# Altium PCB cw312_xc7a35t.PcbDoc (part 2 of 2)
Units mm, origin at the board's own origin, x right, y up, seen from the top; angles counter-clockwise.
Board outline 58.68 x 53.69 mm, 4 copper layers (Top Layer, Layer 1, Layer 2, Bottom Layer), stack 0.603 mm thick; 60 components, 62 nets, 545 pads, 207 vias.
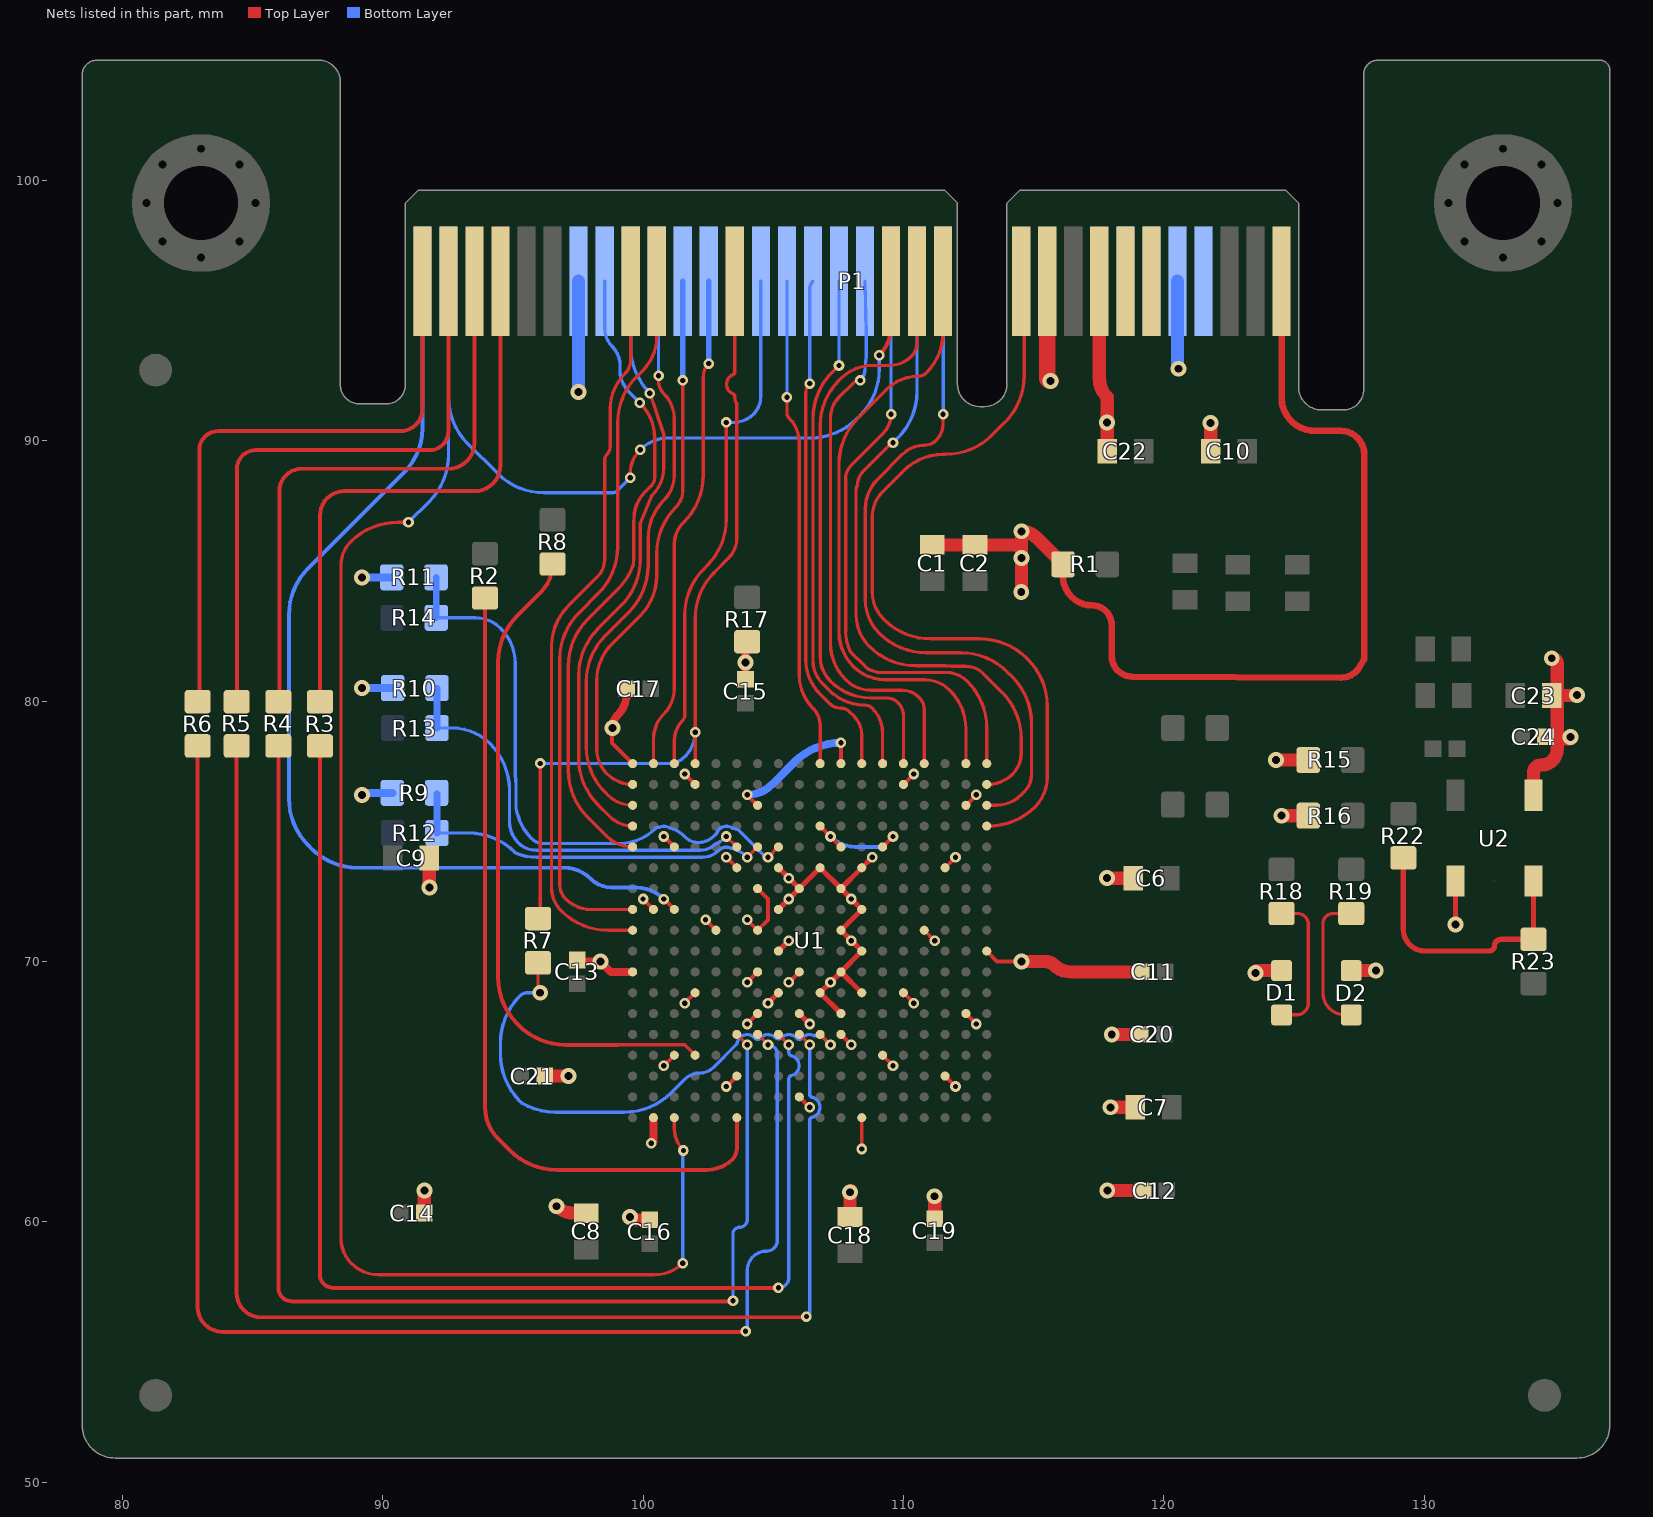
[diagram p4: the nets of this part, all layers, seen from the top]

## Via types
v1: diameter 0.406, hole 0.203, Top Layer to Bottom Layer, tented both sides, 121 vias
v2: diameter 0.61, hole 0.305, Top Layer to Bottom Layer, tented both sides, 86 vias

## Nets (pads, with @x,y where several pads share a name; then routed paths per layer and width w, separated by ;. In a path a pad name is that pad's centre, name@x,y a point inside that pad or via, vN(x,y) a via of type N, cw(c..) or ccw(c..) an arc to the next point about the centre after c; other vN are vias at no path point) (continued)
HDR4: P1.A12 U1.T1 | length 27
  Top Layer w0.127: v1(111.522,91.021) 111.522,90.654 cw(c110.619,90.654) 111.257,90.016 cw(c110.804,90.469) 110.804,89.828 ccw(c110.804,88.638) 109.963,89.479 109.012,88.528 ccw(c110.167,87.374) 108.534,87.374 108.534,83.903 ccw(c110.371,83.903) 109.072,82.604 ccw(c110.868,84.4) 110.868,81.86 112.2,81.86 cw(c112.2,79.32) 113.996,81.116 114.179,80.933 cw(c112.383,79.137) 114.923,79.137 114.923,77.2 cw(c113.951,77.2) 114.638,76.513 114.525,76.4 cw(c113.559,77.366) 113.559,76 U1.T1@113.2,76
  Bottom Layer w0.127: v1(111.522,91.021) 111.525,91.024 P1.A12@111.525,96.127
HDR5: P1.A13 U1.U1 | length 25.2
  Top Layer w0.127: v1(109.6,89.925) ccw(c109.6,89.828) 109.531,89.897 108.463,88.829 ccw(c109.027,88.265) 108.229,88.265 ccw(c108.344,88.15) 108.182,88.15 108.182,83.327 ccw(c109.916,83.327) 108.69,82.1 ccw(c110.486,83.896) 110.486,81.356 111.634,81.356 cw(c111.634,79.94) 111.852,81.339 ccw(c111.87,81.465) 111.87,81.338 112.395,81.338 cw(c112.395,80.378) 113.074,81.057 113.781,80.35 cw(c111.985,78.554) 114.525,78.554 114.525,77.988 cw(c113.41,77.988) 114.198,77.2 cw(c113.233,78.166) 113.233,76.8 U1.U1@113.2,76.8
  Bottom Layer w0.127: v1(109.6,89.925) 109.781,90.106 ccw(c107.985,91.903) 110.525,91.903 P1.A13@110.525,96.127
HDR6: P1.A14 U1.V1 | length 23.1
  Top Layer w0.127: v1(109.525,91.021) cw(c108.477,91.021) 109.218,90.28 108,89.062 ccw(c108.534,88.528) 107.779,88.528 107.779,82.663 ccw(c109.41,82.663) 107.976,81.887 ccw(c108.087,81.949) 107.996,81.86 108.525,81.331 ccw(c109.077,81.883) 108.647,81.231 ccw(c108.716,81.338) 108.659,81.225 ccw(c109.303,82.557) 109.012,81.106 ccw(c109.036,81.23) 109.026,81.104 ccw(c109.077,81.883) 109.077,81.102 111.634,81.102 cw(c111.634,79.94) 112.456,80.762 cw(c110.66,78.966) 113.2,78.966 U1.V1@113.2,77.6
  Bottom Layer w0.127: v1(109.525,91.021) P1.A14@109.525,96.127
HDR7: P1.A15 U1.V4 | length 21.6
  Top Layer w0.127: 108.053,92.197 107.525,91.669 ccw(c108.31,90.884) 107.2,90.884 107.2,82.221 ccw(c109.177,82.221) 107.779,80.823 ccw(c108.76,81.804) 108.76,80.416 109.962,80.416 cw(c109.962,79.537) 110.584,80.159 110.619,80.123 cw(c110.183,79.687) 110.8,79.687 U1.V4@110.8,77.6 ; 108.054,92.197 cw(c108.344,91.906) v1(108.344,92.317)
  Bottom Layer w0.127: v1(108.344,92.317) ccw(c107.908,92.754) 108.525,92.754 cw(c108.652,92.754) 108.526,92.767 108.574,93.249 ccw(c108.182,93.288) 108.576,93.289 108.576,94.091 P1.A15@108.525,96.127
HDR8: P1.A16 U1.V6 | length 20.3
  Top Layer w0.127: v1(107.525,92.892) 107.269,92.636 ccw(c109.065,90.84) 106.525,90.84 106.525,81.561 ccw(c107.791,81.561) 106.896,80.666 107.147,80.414 ccw(c108.51,81.777) 108.51,79.85 cw(c108.51,79.44) 108.8,79.73 cw(c107.834,78.764) 109.2,78.764 U1.V6@109.2,77.6
  Bottom Layer w0.127: v1(107.525,92.892) P1.A16@107.525,96.127
HDR9: P1.A17 U1.V7 | length 19.6
  Top Layer w0.127: v1(106.4,92.197) ccw(c106.766,91.831) 106.248,91.831 106.248,81.604 ccw(c108.145,81.604) 106.804,80.262 107.15,79.916 ccw(c107.6,80.367) 107.6,79.73 cw(c107.6,79.266) 107.928,79.594 108.087,79.435 cw(c107.331,78.679) 108.4,78.679 U1.V7@108.4,77.6
  Bottom Layer w0.127: v1(106.4,92.197) 106.4,95.826 cw(c106.827,95.826) P1.A17@106.525,96.127
HDR10: P1.A18 U1.V9 | length 18.9
  Top Layer w0.127: v1(105.525,91.669) 105.525,91.069 ccw(c105.781,91.069) 105.6,90.888 cw(c104.648,89.936) 105.994,89.936 105.994,81.604 ccw(c108.145,81.604) 106,81.449 cw(c105.873,81.441) 106,81.442 106,80.997 ccw(c107.793,80.997) 106.525,79.73 cw(c105.861,79.066) 106.8,79.066 U1.V9@106.8,77.6
  Bottom Layer w0.127: v1(105.525,91.669) P1.A18@105.525,96.127
IOVREF: C6.1 C7.1 C8.1 C9.1 C10.1 C11.1 C12.1 C13.1 C14.1 C15.1 C16.1 C17.1 C23.1 C24.1 D1.A D2.A P1.A5 P1.A26 P1.B10 R9.2 R10.2 R11.2 R15.1 R16.1 R17.1 U1.A7 U1.A17 U1.B10 U1.C3 U1.C13 U1.D6 U1.D16 U1.F2 U1.G5 U1.G15 U1.H18 U1.J1 U1.K4 U1.K14 U1.L17 U1.N3 U1.N13 U1.P6 U1.P8 U1.P16 U1.R9 U1.T2 U1.T12 U1.U5 U1.U15 U1.V8 U1.V18 U2.1 U2.4 | length 72
  Top Layer w0.152: v2(98.825,78.966) ccw(c98.825,78.94) 98.8,78.94 98.8,78.4 U1.V18@99.6,77.6 ; v1(100,72.399) U1.L17@100.4,72 ; v1(100.8,66) U1.D16@101.2,66.4 ; v1(100.8,74.8) U1.P16@101.2,74.4 ; v1(101.6,68.391) 101.6,68.4 U1.G15@102,68.8 ; v1(101.6,77.2) U1.U15@102,76.8 ; v1(102.4,71.6) U1.K14@102.8,71.2 ; v1(103.2,65.2) U1.C13@103.6,65.6 ; v1(103.2,74) U1.N13@103.6,73.6 ; v1(104,76.4) U1.T12@104.4,76 ; U1.B10@106,64.8 v1(106.4,64.4) ; U1.R9@106.8,75.2 v1(107.2,74.8) U1.P8@107.6,74.4 ; U1.V8@107.6,77.6 v1(107.6,78.4) ; v1(108.4,62.8) U1.A7@108.4,64 ; U1.D6@109.2,66.4 v1(109.6,66) ; U1.P6@109.2,74.4 v1(109.6,74.8) ; U1.G5@110,68.8 110.4,68.4 v1(110.4,68.391) ; U1.U5@110,76.8 v1(110.4,77.2) ; U1.K4@110.8,71.2 v1(111.2,70.8) ; U1.C3@111.6,65.6 v1(112,65.2) ; U1.N3@111.6,73.6 v1(112,74) ; U1.F2@112.4,68 v1(112.8,67.6) ; U1.T2@112.4,76 v1(112.8,76.4) ; U1.J1@113.2,70.4 113.6,70 v2(114.532,70)
  Top Layer w0.203: v2(131.2,71.423) U2.1@131.2,73.089
  Top Layer w0.305: C13.1@97.478,70.06 ccw(c97.623,70.205) 97.623,70 v2(98.361,70) 98.761,69.6 U1.H18@99.6,69.6 ; v2(98.825,78.966) 98.825,78.983 cw(c99.51,78.983) 99.026,79.467 ccw(c98.184,80.308) 99.374,80.308 C17.1@99.374,80.47 ; v1(100.315,63.022) 100.4,63.107 U1.A17@100.4,64 ; C15.1@103.937,80.838 v2(103.937,81.489) 103.937,82.221 cw(c104,82.221) R17.1@104,82.284
  Top Layer w0.508: C14.1@91.6,60.339 v2(91.6,61.2) ; v2(91.792,72.838) C9.1@91.792,73.971 ; v2(96.681,60.6) ccw(c97.311,61.23) 97.311,60.339 C8.1@97.815,60.339 ; v2(99.503,60.187) ccw(c99.77,60.453) 99.77,60.077 C16.1@100.254,60.077 ; v2(114.532,70) 115.464,70 cw(c115.464,69.562) 115.773,69.872 ccw(c116.429,70.528) 116.429,69.6 C11.1@119.14,69.6 ; v2(117.825,73.2) C6.1@118.825,73.2 ; v2(117.83,61.2) C12.1@119.2,61.2 ; v2(117.948,64.4) C7.1@118.9,64.4 ; C10.1@121.8,89.6 v2(121.8,90.688) ; v2(123.52,69.562) cw(c123.608,69.562) 123.608,69.65 D1.A@124.525,69.65 ; v2(124.316,77.74) R15.1@125.55,77.74 ; v2(124.525,75.6) R16.1@125.55,75.6 ; D2.A@127.2,69.65 v2(128.143,69.65) ; U2.4@134.2,76.389 134.2,77.246 cw(c134.501,77.246) 134.501,77.547 ccw(c134.501,78.159) 135.113,78.159 135.113,78.554 ; C23.1@134.9,80.214 C23.1@135.113,80.214 ; v2(134.9,81.646) cw(c134.9,81.433) 135.113,81.433 C23.1@135.113,80.214 ; v2(135.617,78.618) cw(c135.553,78.618) 135.553,78.554 135.113,78.554 ; v2(135.865,80.239) cw(c135.84,80.239) 135.84,80.214 C23.1@135.113,80.214 ; 135.113,78.554 C23.1@135.113,80.214
  Top Layer w0.635: P1.B10@115.525,96.127 115.525,92.423 ccw(c115.649,92.423) v2(115.649,92.298)
  Bottom Layer w0.152: v1(107.2,74.8) ccw(c108.166,75.766) 108.166,74.4 108.717,74.4 ccw(c108.716,74.552) 108.738,74.402 cw(c108.8,74) 108.858,74.402 ccw(c108.878,74.553) 108.876,74.401 109.028,74.4 ccw(c109.028,74.815) 109.321,74.521 v1(109.6,74.8)
  Bottom Layer w0.305: v2(89.2,76.4) cw(c89.393,76.207) 89.393,76.48 R9.2@90.369,76.48 ; v2(89.2,80.502) R10.2@90.384,80.502 ; v2(89.2,84.755) R11.2@90.351,84.755 ; v1(104,76.4) ccw(c104,77.74) 104.948,76.792 105.816,77.661 cw(c107.6,75.877) v1(107.6,78.4)
  Bottom Layer w0.508: v2(97.525,91.872) P1.A26@97.525,96.127 ; P1.A5@120.525,96.127 120.525,92.867 ccw(c120.666,92.867) v2(120.566,92.767)
JTAG_TCK: P1.B32 R6.1 | length 24.1
  Top Layer w0.152: R6.1@82.895,79.98 ccw(c82.895,80.041) 82.956,80.041 82.956,89.637 cw(c83.693,89.637) 83.693,90.373 90.68,90.373 ccw(c90.68,91.218) 91.525,91.218 P1.B32@91.525,96.127
JTAG_TDI: P1.B29 R3.1 | length 22.3
  Top Layer w0.152: R3.1@87.594,79.98 87.594,87.134 cw(c88.522,87.134) 88.522,88.062 93.525,88.062 ccw(c93.525,89.062) 94.525,89.062 P1.B29@94.525,96.127
JTAG_TDO: P1.B30 R4.1 | length 22.9
  Top Layer w0.152: R4.1@85.994,79.98 ccw(c85.994,80.016) 86.03,80.016 86.03,88.062 cw(c86.893,88.062) 86.893,88.925 92.525,88.925 ccw(c92.525,89.925) 93.525,89.925 P1.B30@93.525,96.127
JTAG_TMS: P1.B31 R5.1 | length 23.7
  Top Layer w0.152: R5.1@84.394,79.98 84.404,79.98 84.404,88.925 cw(c85.115,88.925) 85.115,89.637 91.792,89.637 ccw(c91.792,90.37) 92.525,90.37 P1.B31@92.525,96.127
JTAG_TRST: P1.A32 U1.L16 | length 38.6
  Top Layer w0.152: v1@100.8,72.4 U1.L16@101.2,72
  Bottom Layer w0.152: P1.A32@91.525,96.127 91.525,90.474 cw(c89.158,90.474) 90.832,88.8 87.144,85.112 ccw(c88.94,83.316) 86.4,83.316 86.4,76.252 ccw(c88.94,76.252) 87.144,74.456 87.256,74.344 ccw(c89.052,76.14) 89.052,73.6 96.962,73.6 cw(c96.962,72.139) 97.995,73.172 ccw(c98.802,73.978) 98.802,72.838 99.735,72.838 cw(c99.735,71.332) v1(100.8,72.397)
LED1: P1.B11 U1.R1 | length 30.4
  Top Layer w0.127: U1.R1@113.2,75.2 113.264,75.2 ccw(c113.264,77.74) 115.06,75.944 ccw(c113.937,77.067) 115.525,77.067 115.525,79.808 ccw(c112.985,79.808) 114.781,81.604 114.739,81.646 ccw(c112.943,79.85) 112.943,82.39 111.049,82.39 cw(c111.049,84.93) 109.253,83.134 109.241,83.146 cw(c110.306,84.211) 108.8,84.211 108.8,87.052 cw(c110.227,87.052) 109.218,88.062 110.009,88.853 cw(c111.522,87.34) 111.522,89.479 111.618,89.479 ccw(c111.618,92.019) 113.414,90.223 113.894,90.703 ccw(c112.098,92.499) 114.638,92.499 114.638,95.854 ccw(c114.252,95.854) P1.B11@114.525,96.127
LED2: P1.B12 U1.V2 | length 23.8
  Top Layer w0.127: P1.B12@111.525,96.127 111.525,94.173 cw(c109.303,94.173) 110.874,92.602 cw(c110.584,92.892) 110.584,92.481 ccw(c110.584,90.74) 109.352,91.971 108.269,90.888 ccw(c110.065,89.092) 107.525,89.092 107.525,82.663 ccw(c109.41,82.663) 108.077,81.331 ccw(c109.303,82.557) 109.303,80.823 110.804,80.823 cw(c110.804,79.435) 111.785,80.416 cw(c110.302,78.933) 112.4,78.933 U1.V2@112.4,77.6
LED3: P1.B13 U1.V5 | length 23.1
  Top Layer w0.127: U1.V5@110,77.6 110,79.439 ccw(c109.291,79.439) 109.792,79.94 109.79,79.942 ccw(c109.352,79.504) 109.352,80.123 108.741,80.123 cw(c108.741,82.303) 107.2,80.762 cw(c108.166,81.727) 106.8,81.727 106.8,90.567 cw(c109.275,90.567) 107.525,92.317 107.604,92.396 cw(c108.8,91.201) 108.8,92.892 109.463,92.892 ccw(c109.463,94.092) 110.312,93.243 ccw(c109.798,93.757) 110.525,93.757 P1.B13@110.525,96.127
M0: R9.1 R12.2 U1.P12 | length 14.5
  Top Layer w0.127: v1(104,74) U1.P12@104.4,74.4
  Bottom Layer w0.127: R9.1@92.069,76.48 cw(c92.031,76.443) R9.1@92.084,76.443 ; R12.2@92.084,74.937 93.282,74.937 cw(c93.282,72.397) 95.078,74.193 95.094,74.177 ccw(c95.906,75.953) 95.906,74 102.281,74 ccw(c102.281,74.834) 102.871,74.244 ccw(c102.827,74.364) 102.918,74.274 cw(c103.2,74) 103.371,74.355 ccw(c103.425,74.47) 103.398,74.346 cw(c103.165,73.248) 103.959,74.041 v1(104,74)
  Bottom Layer w0.254: R12.2@92.084,74.937 R9.1@92.084,76.443
M1: R10.1 R13.2 U1.P13 | length 16.6
  Top Layer w0.127: v1(103.2,74.8) U1.P13@103.6,74.4
  Bottom Layer w0.127: R13.2@92.084,78.966 92.681,78.966 cw(c92.681,76.924) 94.124,78.368 cw(c92.328,76.572) 94.868,76.572 94.868,75.388 ccw(c96.049,75.388) 95.214,74.552 ccw(c95.885,75.223) 95.885,74.274 102.202,74.274 ccw(c102.202,75.096) 102.783,74.515 ccw(c102.764,74.641) 102.835,74.535 cw(c103.2,74) 102.939,74.593 ccw(c102.887,74.709) 102.956,74.602 ccw(c102.125,75.875) v1(103.2,74.8)
  Bottom Layer w0.254: R13.2@92.084,78.966 R10.1@92.084,80.502
M2: R11.1 R14.2 U1.P11 | length 23.3
  Top Layer w0.127: v1(104.8,74) 104.8,74.008 105.192,74.4 U1.P11@105.2,74.4
  Bottom Layer w0.127: R14.2@92.059,83.2 93.559,83.2 cw(c93.559,81.834) 94.525,82.8 cw(c93.15,81.425) 95.094,81.425 95.094,77.174 ccw(c95.221,77.175) 95.096,77.158 cw(c92.328,76.773) 95.122,76.773 95.122,75.911 ccw(c95.249,75.911) 95.124,75.892 ccw(c97.271,76.248) 95.732,74.709 ccw(c96.151,75.128) 96.151,74.535 99.111,74.535 ccw(c99.111,76.42) 100.444,75.087 cw(c100.619,74.912) 100.619,75.16 ccw(c100.615,75.287) 100.659,75.168 cw(c100.8,74.8) 101.001,75.139 ccw(c101.064,75.249) 101.035,75.125 cw(c100.8,74.089) 101.551,74.84 101.603,74.788 ccw(c102.125,75.309) 102.125,74.572 ccw(c102.125,75.429) 102.731,74.823 102.789,74.881 ccw(c102.712,74.982) 102.831,74.937 cw(c103.2,74.8) 103.411,75.133 ccw(c103.471,75.244) 103.459,75.118 cw(c103.425,74.717) 103.71,75.001 104.648,74.063 ccw(c104.8,74.214) v1(104.8,74)
  Bottom Layer w0.254: R11.1@92.051,84.755 92.051,83.208 R14.2@92.059,83.2
MISO: P1.B23 U1.L18 | length 27.6
  Top Layer w0.127: U1.L18@99.6,72 97.991,72 cw(c97.991,73.366) 97.025,72.4 cw(c97.568,72.943) 96.8,72.943 96.8,81.603 cw(c99.34,81.603) 97.544,83.399 98.282,84.137 ccw(c96.486,85.933) 99.026,85.933 99.026,90.688 cw(c101.566,90.688) 99.77,92.484 100,92.715 ccw(c98.733,93.982) 100.525,93.982 P1.B23@100.525,96.127
MOSI: P1.B24 U1.K18 | length 28.2
  Top Layer w0.127: P1.B24@99.525,96.127 99.525,93.132 cw(c98.696,93.132) 99.282,92.545 ccw(c100.597,91.231) 98.737,91.231 98.737,89.78 cw(c98.312,89.78) 98.613,89.479 ccw(c98.825,89.267) 98.525,89.267 98.525,85.452 cw(c97.558,85.452) 98.242,84.768 97.13,83.656 ccw(c98.684,82.102) 96.486,82.102 96.486,72.838 ccw(c97.75,72.838) 96.856,71.944 ccw(c98.652,73.74) 98.652,71.2 U1.K18@99.6,71.2
NetD1_K: D1.K R18.2 | length 5.6
  Top Layer w0.127: D1.K@124.525,67.95 125.1,67.95 ccw(c125.1,68.4) 125.55,68.4 125.55,71.423 ccw(c125.129,71.423) 125.129,71.844 R18.2@124.525,71.844
NetD2_K: D2.K R19.2 | length 5.5
  Top Layer w0.127: D2.K@127.2,67.95 126.962,67.95 cw(c126.962,68.8) 126.112,68.8 126.112,71.45 cw(c126.506,71.45) 126.506,71.844 R19.2@127.2,71.844
NetR2_2: R2.2 U1.A13 | length 32
  Top Layer w0.152: R2.2@93.929,83.961 93.929,64.407 ccw(c95.636,64.407) 94.429,63.2 94.885,62.744 ccw(c96.681,64.54) 96.681,62 102.463,62 ccw(c102.463,63.366) 103.429,62.4 ccw(c103.015,62.813) 103.6,62.813 U1.A13@103.6,64
NetR3_2: R3.2 U1.E11 | length 48.7
  Top Layer w0.127: U1.E11@105.2,67.2 v1(105.6,66.8)
  Top Layer w0.152: R3.2@87.594,78.28 87.594,57.966 ccw(c88.094,57.966) 88.094,57.466 v1(105.2,57.466)
  Bottom Layer w0.127: v1(105.2,57.466) ccw(c105.2,57.866) 105.6,57.866 105.6,65.496 cw(c105.727,65.495) 105.695,65.618 ccw(c105.6,66) 105.695,66.382 cw(c105.727,66.505) 105.6,66.504 v1(105.6,66.8)
NetR4_2: R4.2 U1.E13 | length 49.3
  Top Layer w0.127: U1.E13@103.6,67.2 v1(104,66.8)
  Top Layer w0.152: R4.2@85.994,78.28 85.994,57.466 ccw(c86.512,57.466) 86.512,56.947 103.429,56.947 ccw(c103.429,56.972) v1(103.454,56.972)
  Bottom Layer w0.127: v1(103.454,56.972) 103.454,59.538 cw(c103.708,59.538) 103.708,59.792 ccw(c103.708,60.083) 104,60.083 v1(104,66.8)
NetR5_2: R5.2 U1.E10 | length 54.9
  Top Layer w0.127: U1.E10@106,67.2 v1(106.4,66.8)
  Top Layer w0.152: R5.2@84.394,78.28 84.394,57.262 ccw(c85.319,57.262) 85.319,56.337 106.248,56.337 ccw(c106.248,56.363) v1(106.274,56.363)
  Bottom Layer w0.127: v1(106.274,56.363) ccw(c106.274,56.489) 106.4,56.489 106.4,63.896 cw(c106.527,63.895) 106.495,64.018 ccw(c106.4,64.4) 106.495,64.782 cw(c106.527,64.905) 106.4,64.904 v1(106.4,66.8)
NetR6_2: R6.2 U1.E12 | length 55.6
  Top Layer w0.127: U1.E12@104.4,67.2 v1(104.8,66.8)
  Top Layer w0.152: R6.2@82.895,78.28 82.895,56.729 ccw(c83.845,56.729) 83.845,55.778 103.911,55.778 ccw(c103.911,55.804) v1(103.937,55.804)
  Bottom Layer w0.127: v1(103.937,55.804) ccw(c103.937,55.867) 104,55.867 104,58.128 cw(c104.75,58.128) 104.75,58.877 ccw(c104.75,59.284) 105.156,59.284 105.156,66.444 ccw(c104.8,66.444) v1(104.8,66.8)
NetR7_2: R7.2 U1.E9 | length 20.6
  Top Layer w0.127: R7.2@95.966,69.95 95.966,68.941 ccw(c96.166,68.941) 96.025,68.8 v2(96.049,68.8) ; U1.E9@106.8,67.2 v1(107.2,66.8)
  Bottom Layer w0.127: v2(96.049,68.8) 95.569,68.8 ccw(c95.569,68.376) 95.269,68.676 ccw(c97.065,66.88) 94.525,66.88 94.525,66.433 ccw(c97.065,66.433) 95.269,64.637 95.332,64.574 ccw(c96.637,66.753) 96.637,64.213 99.281,64.213 ccw(c99.281,66.753) 101.077,64.957 101.584,65.464 cw(c102.202,64.845) 102.202,65.72 ccw(c102.202,66.408) 102.689,65.921 103.58,66.812 ccw(c103.489,66.901) 103.614,66.876 cw(c104,66.8) 104.301,67.053 ccw(c104.398,67.136) 104.376,67.011 104.382,67.01 ccw(c104.402,67.135) 104.498,67.053 cw(c104.8,66.8) 105.075,67.082 ccw(c105.163,67.173) 105.122,67.053 105.18,67.034 ccw(c105.219,67.155) 105.311,67.068 cw(c105.6,66.8) 105.903,67.051 ccw(c106,67.133) 106.097,67.051 cw(c106.4,66.8) 106.576,67.152 ccw(c106.631,67.267) 106.673,67.147 cw(c106.673,66.712) 106.981,67.019 v1(107.2,66.8)
NetR8_2: R8.2 U1.D15 | length 25.8
  Top Layer w0.127: 99.026,66.8 101.6,66.8 U1.D15@102,66.4
  Top Layer w0.152: R8.2@96.525,85.266 cw(c95.006,85.266) 96.08,84.192 95.173,83.285 ccw(c96.969,81.489) 94.429,81.489 94.429,69.397 ccw(c96.969,69.397) 95.173,67.601 95.23,67.544 ccw(c97.026,69.34) 97.026,66.8 99.026,66.8
NetR22_2: R22.2 R23.1 U2.3 | length 10.7
  Top Layer w0.203: R22.2@129.2,73.978 129.2,71.233 ccw(c130.033,71.233) 130.033,70.4 132.5,70.4 ccw(c132.5,70.6) 132.7,70.6 cw(c132.95,70.6) 132.95,70.85 R23.1@134.2,70.85 U2.3@134.2,73.089
nRST: P1.A31 P1.B14 U1.A16 | length 83.6
  Top Layer w0.127: v1(90.99,86.866) 90.566,86.866 ccw(c90.566,84.326) 88.77,86.122 ccw(c89.664,85.228) 88.4,85.228 88.4,59.366 ccw(c89.766,59.366) 88.8,58.4 ccw(c89.849,59.449) 89.849,57.966 100.442,57.966 ccw(c100.442,59.498) v1(101.525,58.414) ; v1(99.503,88.585) 99.503,88.724 cw(c100.824,88.724) v1(99.89,89.658) ; U1.A16@101.2,64 101.2,63.591 ccw(c102.399,63.591) v1(101.551,62.742)
  Top Layer w0.152: v1(109.077,93.288) ccw(c107.995,94.37) 109.525,94.37 P1.B14@109.525,96.127
  Bottom Layer w0.127: v1@90.832,86.8 ccw(c90.832,87.024) v1(90.99,86.866) 91.781,87.656 ccw(c89.985,89.453) 92.525,89.453 92.525,91.681 ; P1.A31@92.525,96.127 92.525,91.681 ; v1(99.503,88.585) 98.985,88.066 cw(c98.825,88.226) 98.825,88 96.206,88 cw(c96.206,90.54) 94.41,88.744 93.269,89.885 cw(c95.065,91.681) 92.525,91.681 ; v1(99.89,89.658) cw(c100.973,88.575) 100.973,90.106 106.418,90.106 ccw(c106.418,92.646) 108.214,90.85 108.333,90.97 ccw(c106.537,92.766) 109.077,92.766 v1(109.077,93.288) ; v1(101.525,58.414) 101.525,62.679 cw(c101.615,62.679) v1(101.551,62.742)
nRST_OUT: P1.A19 U1.V16 | length 20
  Top Layer w0.127: U1.V16@101.2,77.6 101.2,78.481 cw(c102.31,78.481) 101.525,79.266 ccw(c101.344,79.447) 101.6,79.447 101.6,83.294 cw(c104.14,83.294) 102.344,85.09 102.456,85.202 ccw(c100.66,86.998) 103.2,86.998 v1(103.2,90.703)
  Bottom Layer w0.127: v1(103.2,90.703) 103.474,90.703 ccw(c103.474,91.788) 104.242,91.021 ccw(c103.557,91.705) 104.525,91.705 P1.A19@104.525,96.127
SCK: P1.B20 R7.1 U1.V15 | length 32
  Top Layer w0.127: R7.1@95.966,71.65 ccw(c95.767,71.85) 96.049,71.85 96.049,72.458 ; 96.025,72.4 ccw(c95.966,72.458) 96.049,72.458 ; v1(96.049,77.606) 96.049,72.458 ; U1.V15@102,77.6 v1(102,78.8) 102,83.158 cw(c104.54,83.158) 102.744,84.955 103.279,85.49 ccw(c102.505,86.264) 103.6,86.264 103.6,91.44 cw(c103.781,91.621) 103.525,91.621 103.525,91.691 ccw(c103.398,91.69) 103.447,91.808 cw(c103.6,92.17) 103.447,92.533 ccw(c103.397,92.65) 103.524,92.648 P1.B20@103.525,96.127
  Bottom Layer w0.127: v1(96.049,77.606) 100.959,77.606 ccw(c100.959,78.539) 101.619,77.879 ccw(c100.698,78.8) v1(102,78.8)
SHUNTL: C1.1 C2.1 P1.B1 R1.1 U1.F8 U1.F10 U1.G7 U1.G9 U1.G11 U1.H8 U1.J7 U1.J11 U1.K8 U1.L7 U1.L11 U1.M8 U1.M10 U1.N7 U1.N9 U1.N11 | length 55.5
  Top Layer w0.203: v1(104.8,68.4) U1.G11@105.2,68.8 ; U1.J11@105.2,70.4 v1(105.6,70.8) ; U1.L11@105.2,72 v1(105.6,72.4) U1.M10@106,72.8 ; U1.N11@105.2,73.6 v1(105.6,73.2) U1.M10@106,72.8 ; U1.F10@106,68 v1(106.4,67.6) ; U1.F8@107.6,68 U1.G9@106.8,68.8 v1(107.2,69.2) U1.H8@107.6,69.6 ; U1.G7@108.4,68.8 U1.H8@107.6,69.6 ; v1(108.8,74) U1.N7@108.4,73.6 U1.M8@107.6,72.8 ; U1.M10@106,72.8 U1.N9@106.8,73.6 U1.M8@107.6,72.8 ; U1.H8@107.6,69.6 U1.J7@108.4,70.4 v1(108,70.8) U1.K8@107.6,71.2 U1.L7@108.4,72 v1(108,72.4) U1.M8@107.6,72.8
  Top Layer w0.254: R1.1@116.13,85.255 116.13,84.793 ccw(c117.246,84.793) 117.246,83.676 cw(c117.246,82.923) 118,82.923 118,81.732 ccw(c118.789,81.732) 118.789,80.943 cw(c118.789,80.689) 118.79,80.943 126.797,80.899 ccw(c126.799,81.731) 127.509,81.298 127.663,81.549 ccw(c127.446,81.682) 127.7,81.682 127.7,89.479 ccw(c126.799,89.479) 126.799,90.381 125.8,90.381 cw(c125.8,91.656) 124.525,91.656 P1.B1@124.525,96.127
  Top Layer w0.508: C1.1@111.11,86 C2.1@112.745,86 114.523,86 114.532,86.009 ; v2(114.526,84.198) 114.532,84.192 v2(114.532,85.495) 114.532,86.009 ; R1.1@116.13,85.255 115.096,86.289 ccw(c114.532,85.725) v2(114.532,86.523) 114.532,86.009
TRACECLK: P1.A21 U1.V17 | length 19.1
  Top Layer w0.127: U1.V17@100.4,77.6 100.4,78.539 cw(c101.766,78.539) 100.8,79.504 ccw(c99.834,80.47) 101.2,80.47 101.2,86.045 cw(c102.31,86.045) 101.525,86.83 101.566,86.871 ccw(c99.77,88.667) 102.31,88.667 102.31,92.444 cw(c103.045,92.444) v1(102.525,92.964)
  Bottom Layer w0.203: v1(102.525,92.964) P1.A21@102.525,96.127
TRACED0: P1.A22 U1.U18 | length 21.2
  Top Layer w0.127: U1.U18@99.6,76.8 cw(c99.6,78.196) 98.613,77.209 cw(c99.557,78.153) 98.222,78.153 98.222,80.793 cw(c100.196,80.793) 98.8,82.189 99.891,83.281 ccw(c98.361,84.811) 100.525,84.811 100.525,85.663 cw(c103.065,85.663) 101.269,87.459 ccw(c100.651,88.077) 101.525,88.077 v1(101.525,92.317)
  Bottom Layer w0.203: v1(101.525,92.317) P1.A22@101.525,96.127
TRACED1: P1.A23 U1.T18 | length 22.2
  Top Layer w0.127: U1.T18@99.6,76 cw(c99.6,77.365) 98.635,76.4 98.559,76.475 cw(c100.355,78.271) 97.815,78.271 97.815,80.731 cw(c100.355,80.731) 98.559,82.527 99.452,83.42 ccw(c97.656,85.216) 100.196,85.216 100.196,86.256 cw(c102.258,86.256) 100.8,87.715 ccw(c99.834,88.681) 101.2,88.681 101.2,90.842 ccw(c99.834,90.842) 100.8,91.808 cw(c101.291,92.298) 100.597,92.298 v1(100.597,92.499)
  Bottom Layer w0.127: P1.A23@100.525,96.127 cw(c100.352,95.954) 100.597,95.954 v1(100.597,92.499)
TRACED2: P1.A24 U1.R18 | length 23.2
  Top Layer w0.127: U1.R18@99.6,75.2 cw(c99.6,76.43) 98.73,75.56 98.269,76.022 cw(c100.065,77.818) 97.525,77.818 97.525,80.982 cw(c100.065,80.982) 98.269,82.778 99.147,83.656 ccw(c97.351,85.452) 99.891,85.452 99.891,86.795 cw(c100.018,86.795) 99.901,86.843 100.328,87.875 cw(c100.446,87.826) 100.355,87.915 ccw(c99.282,88.989) 100.8,88.989 100.8,90.21 ccw(c100.673,90.21) 100.793,90.251 v1(100.262,91.829)
  Bottom Layer w0.127: P1.A24@99.525,96.127 99.525,93.608 ccw(c102.042,93.608) v1(100.262,91.829)
TRACED3: P1.A25 U1.P18 | length 24.6
  Top Layer w0.127: U1.P18@99.6,74.4 cw(c99.6,75.811) 98.602,74.813 97.874,75.542 cw(c99.67,77.338) 97.13,77.338 97.13,81.345 cw(c99.67,81.345) 97.874,83.141 99.026,84.293 ccw(c97.23,86.089) 99.623,85.24 ccw(c99.503,85.282) 99.63,85.271 ccw(c97.351,85.452) 99.637,85.452 99.637,86.795 cw(c101.476,86.795) 99.652,87.024 cw(c101.057,87.024) 100.063,88.018 100.315,88.27 ccw(c100,88.585) 100.332,88.288 ; v1(99.875,91.456) 99.891,91.44 cw(c98.553,90.101) 100.446,90.101 100.446,88.585 cw(c100,88.585) 100.427,88.456 cw(c100.305,88.493) 100.42,88.439 cw(c99.282,88.989) 100.343,88.302 cw(c100.237,88.371) 100.333,88.289
  Bottom Layer w0.127: P1.A25@98.525,96.127 98.525,94.334 ccw(c99.55,94.334) 98.825,93.608 cw(c98.135,92.918) 99.111,92.918 99.111,92.723 ccw(c100.325,92.723) 99.467,91.864 v1(99.875,91.456)
VCC1.0: P1.B6
VCC1.2: P1.B7
VCC1.8: C18.1 C19.1 C20.1 C21.1 C22.1 P1.B8 U1.E8 U1.F12 U1.H10 U1.H12 U1.K12 U1.M12 | length 15.3
  Top Layer w0.152: v1(104,67.6) U1.F12@104.4,68 ; v1(104,69.2) U1.H12@104.4,69.6 ; v1(104,71.6) U1.K12@104.4,71.2 104.8,71.6 104.8,72.4 U1.M12@104.4,72.8 ; v1(105.6,69.2) U1.H10@106,69.6 ; U1.E8@107.6,67.2 v1(108,66.8)
  Top Layer w0.508: C21.1@96.226,65.6 v2(97.13,65.6) ; C18.1@107.95,60.187 v2(107.95,61.138) cw(c108.037,61.138) v2@107.976,61.2 ; C19.1@111.2,60.119 v2@111.2,60.983 ; P1.B8@117.525,96.127 117.525,92.393 ccw(c118.549,92.393) 117.825,91.669 v2(117.825,90.703) C22.1@117.825,89.6 ; v2(118,67.2) C20.1@119.098,67.2
  other v2: 111.199,60.984
VCC2.5: P1.A4
VCC5.0: P1.A6
VCCADJ: P1.A7
pads on no net: D1.0 D2.0 FID1.M1 FID2.M1 FID3.M1 P1.A30 P1.B28 R1.0 R2.0 R3.0 R4.0 R5.0 R6.0 R7.0 R8.0 R9.0 R10.0 R11.0 R12.0 R13.0 R14.0 R15.0 R16.0 R17.0 R18.0 R19.0 R20.0 R21.0 R22.0 R23.0 U1.A1 U1.A3 U1.A4 U1.A5 U1.A6 U1.A8 U1.A9 U1.A10 U1.A11 U1.A14 U1.A15 U1.A18 U1.B1 U1.B2 U1.B3 U1.B4 U1.B6 U1.B7 U1.B8 U1.B9 U1.B11 U1.B12 U1.B13 U1.B14 U1.B16 U1.B17 U1.B18 U1.C1 U1.C2 U1.C4 U1.C5 U1.C6 U1.C7 U1.C9 U1.C10 U1.C11 U1.C12 U1.C14 U1.C15 U1.C16 U1.C17 U1.D2 U1.D3 U1.D4 U1.D5 U1.D7 U1.D8 U1.D9 U1.D10 U1.D12 U1.D13 U1.D14 U1.D17 U1.D18 U1.E1 U1.E2 U1.E3 U1.E5 U1.E6 U1.E7 U1.E15 U1.E16 U1.E17 U1.E18 U1.F1 U1.F3 U1.F4 U1.F5 U1.F6 U1.F13 U1.F14 U1.F15 U1.F16 U1.F18 U1.G1 U1.G2 U1.G3 U1.G4 U1.G6 U1.G13 U1.G14 U1.G16 U1.G17 U1.H1 U1.H2 U1.H4 U1.H5 U1.H6 U1.H14 U1.H15 U1.H16 U1.H17 U1.J2 U1.J3 U1.J4 U1.J5 U1.J9 U1.J10 U1.J13 U1.J14 U1.J15 U1.J17 U1.J18 U1.K1 U1.K2 U1.K3 U1.K5 U1.K6 U1.K9 U1.K10 U1.K13 U1.K15 U1.K16 U1.K17 U1.L3 U1.L4 U1.L5 U1.L6 U1.L9 U1.L10 U1.L13 U1.L14 U1.L15 U1.M2 U1.M3 U1.M4 U1.M6 U1.M13 U1.M14 U1.M16 U1.M17 U1.M18 U1.N2 U1.N4 U1.N5 U1.N6 U1.N14 U1.N15 U1.N16 U1.N17 U1.P2 U1.P3 U1.P4 U1.P5 U1.P14 U1.P15 U1.P17 U1.R2 U1.R3 U1.R5 U1.R6 U1.R7 U1.R8 U1.R10 U1.R11 U1.R12 U1.R13 U1.R15 U1.R16 U1.R17 U1.T3 U1.T4 U1.T5 U1.T6 U1.T8 U1.T9 U1.T10 U1.T11 U1.T13 U1.T14 U1.T15 U1.T16 U1.U2 U1.U3 U1.U4 U1.U6 U1.U7 U1.U8 U1.U9 U1.U11 U1.U12 U1.U13 U1.U14 U1.U16 U1.U17

## Polygon pours and split planes (outlines as drawn)
IOVREF on Layer 2 "IOVREF_L03_P001" (solid, pour order 1): 78.486,105.41 139.7,105.41 139.7,47.904 138.278,46.482 135.56,49.2 74.701,49.2 74.701,101.625 76.378,103.302
SHUNTL on Layer 2 "SHUNTL_L03_P000" (solid, pour order 0): 116.408,87.757 116.84,87.325 116.84,80.518 116.129,79.807 111.531,79.807 109.169,77.445 109.169,67.92 109.12,67.92 108.459,67.259 104.851,67.259 104.038,68.072 104.4,68.434 104.4,84.309 107.848,87.757
GND on Top Layer "GND_L01_P007" (solid, pour order 7): 78,105.6 cw(c78.4,105.6) 78.4,106 89.2,106 cw(c89.2,105.536) 89.664,105.536 89.664,95.2 78,95.2 cw(c78,96) 77.2,96 77.2,97.651
GND on Top Layer "GND_L01_P005" (solid, pour order 5): 132.5,74 136.586,74 ccw(c136.586,74.193) 136.779,74.193 136.779,103.607 ccw(c136.5,103.607) 136.5,103.886 128.448,103.886 ccw(c128.448,103.632) 128.194,103.632 128.194,83.707 cw(c128.143,83.707) 128.143,83.656 130.998,83.656 cw(c130.998,83.394) 131.26,83.394 131.26,77.6 131.798,77.6 cw(c131.798,77.419) 131.978,77.419 131.978,74.371 ccw(c132.283,74.371) 132.283,74.066
SHUNTL on Top Layer "SHUNTL_L01_P002" (solid, pour order 2): 110.75,87.024 cw(c111.599,86.175) 111.599,87.375 115.501,87.375 cw(c115.501,86.358) 116.219,87.077 cw(c115.832,86.69) 116.38,86.69 116.38,84.337 cw(c115.526,84.337) 116.13,83.734 cw(c115.942,83.922) 115.942,83.656 113.962,83.656 cw(c113.962,84.065) 113.673,83.776 cw(c113.947,84.05) 113.559,84.05 113.559,85.102 ccw(c113.065,85.102) 113.414,85.452 ccw(c113.26,85.297) 113.26,85.516 110.754,85.516 cw(c110.754,86.017) 110.4,85.663 cw(c110.723,85.986) 110.266,85.986 110.266,86.523 cw(c110.724,86.523) 110.4,86.846 110.547,86.993
VCC1.8 on Bottom Layer "VCC1.8_L04_P003" (solid, remove dead copper, pour order 3): 103.194,73.6 117.748,73.6 ccw(c117.748,76.14) 119.544,74.344 120,74.8 ccw(c119.304,75.496) 120.288,75.496 120.288,80.452 ccw(c119.179,80.452) 119.964,81.236 117.628,83.572 cw(c119.424,85.368) 116.884,85.368 116.884,92.964 cw(c117.453,92.394) 117.453,93.2 117.777,93.2 cw(c117.781,92.148) 118.525,92.892 cw(c117.861,92.228) 118.8,92.228 118.8,87.052 ccw(c121.34,87.052) 119.544,85.256 122,82.8 cw(c121.034,81.834) 122.4,81.834 122.4,61.39 cw(c119.86,61.39) 121.656,59.594 121.6,59.538 cw(c120.785,60.353) 120.785,59.2 91.128,59.2 cw(c91.128,61.22) 89.7,59.792 cw(c90.907,60.999) 89.2,60.999 89.2,71.348 cw(c91.74,71.348) 89.944,73.144 90,73.2
GND on Bottom Layer "GND_L04_P006" (solid, pour order 6): 126.949,105.867 cw(c127.279,105.867) 127.279,106.197 138.684,106.197 cw(c138.684,106.096) 138.786,106.096 138.786,66.167 cw(c137.947,66.167) 137.947,65.329 129.388,65.329 cw(c129.388,66.066) 128.651,66.066 128.651,90.283 ccw(c127.229,90.283) 127.229,91.705
GND on Layer 1 (split plane): 173 vertices, not listed, extent 78.966,51.436 136.623,104.109

## Silkscreen, mask and mechanical layers (free items; w line width, h text height)
Top Overlay:
  lines w0.127: 113.702,83.137 ccw(c114.124,83.137) 114.124,82.715 119.352,82.715 ccw(c119.352,83.137) 119.774,83.137 119.774,86.834 119.774,87.435 ccw(c119.352,87.435) 119.352,87.857 114.18,87.857 ccw(c114.18,87.379) 113.702,87.379 113.702,86.398 113.702,83.137
  text "DNM" at 110.376,86.834 h1.91
  text "SHUNT" at 114.427,83.007 h1.91
  text "DONE" at 124.987,63.022 h1.8 r90
  text "INITB" at 127.676,62.8 h1.8 r90
  text "ChipWhisperer" at 116,58.35 h2.5
  text "NAE-CW312T-A35" at 112,56.158 h2.5
  text "NewAE Technology Inc." at 87.6,55.206 h2
  text "Artix A35 FPGA Target" at 111.705,54.449 h2.5
  text "Serious Tools." at 87.6,53.056 h2
  text "CSG324 Package FPGA" at 111.708,52.494 h2.5
Bottom Overlay:
  drawing of 4 lines, arcs and shapes, not listed
  text "NewAE Technology Inc." at 114.4,88.806 h2
  text "FPGA mode setting:" at 97.6,86.395 h2
  text "ChipWhisperer" at 121.28,85.12 h5 r45
  text "M2" at 89.488,84.954 h2.29 r90
  text "1" at 87.89,84.039 h1.02
  text "0" at 88.036,82.525 h1.02
  text "Fault Injection!" at 110.609,81.564 h2 r330
  text "M1" at 89.488,80.917 h2.29 r90
  text "Highly Professional Tools!" at 134.603,79.952 h2 r330
  text "1" at 87.85,79.876 h1.02
  text "0" at 87.986,78.486 h1.02
  text "Power Analysis!" at 130.197,77.152 h2 r30
  text "M0" at 89.488,76.564 h2.29 r90
  text "1" at 87.85,75.526 h1.02
  text "0" at 87.986,74.193 h1.02
  text "Default is 1-1-1 due to" at 97.984,71.888 h2
  text "pull-ups on FPGA." at 98,70.407 h2
  text "ChipWhisperer is a trademark of NewAE Technology Inc. It's even a registered trademarks in a wack of countries." at 82,70 h1.3 r112
  text "®" at 103.005,67.795 h4 r45
  text "Hard to believe it but this board is" at 134.4,67.655 h2
  text "Open Source" at 124.609,65.215 h4
  text "Although it's designed in Altium oops." at 122.018,63.207 h2
  text "C" at 115.143,54.179 h11.43
  text "W" at 104.983,54.041 h7.62
  text "Rev: 01" at 132.8,53.285 h2
  text "p" at 99.395,53.085 h7.62
  text "Do not dispose of incorrectly!!!1!1" at 112.4,52.007 h2
Mechanical 1:
  lines w0.1: 78.457,102.985 78.457,104.043 cw(c79.032,104.043) 79.032,104.618 87.532,104.618 cw(c87.532,103.775) 88.375,103.775 88.375,93.881 88.375,92.153 ; 90.875,92.161 90.875,93.881 90.875,99.127 91.375,99.627 111.575,99.627 112.075,99.127 112.075,92.177 ; 113.975,92.177 113.975,99.127 114.475,99.627 124.675,99.627 125.175,99.127 125.175,93.915 125.175,92.075 ; 127.675,91.961 127.675,104.061 cw(c128.232,104.061) 128.232,104.618 136.732,104.618 cw(c136.732,104.218) 137.132,104.218
  lines w0.101: 78.457,102.985 78.457,52.197 ccw(c79.727,52.197) 79.727,50.927 135.862,50.927 ccw(c135.862,52.197) 137.132,52.197 137.132,104.218 ; 88.375,92.153 ccw(c89.114,92.153) 89.114,91.415 90.128,91.415 ccw(c90.128,92.161) 90.875,92.161 ; 112.075,92.177 ccw(c112.939,92.177) 112.939,91.313 113.111,91.313 ccw(c113.111,92.177) 113.975,92.177 ; 125.175,92.075 ccw(c126.064,92.075) 126.064,91.186 126.9,91.186 ccw(c126.9,91.961) 127.675,91.961